# EAGLE board BeatLights (EAGLE 6.3)
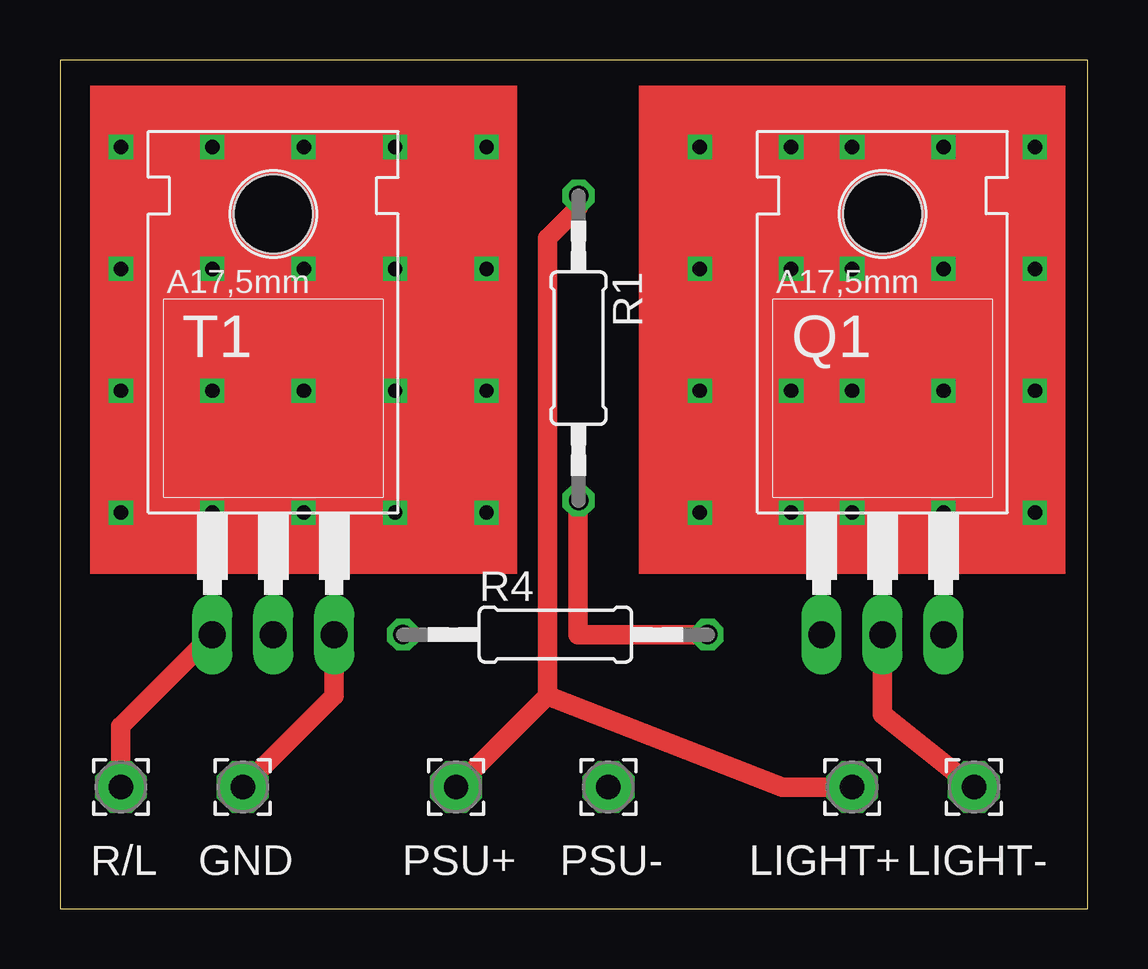
[diagram p0: board, top side]
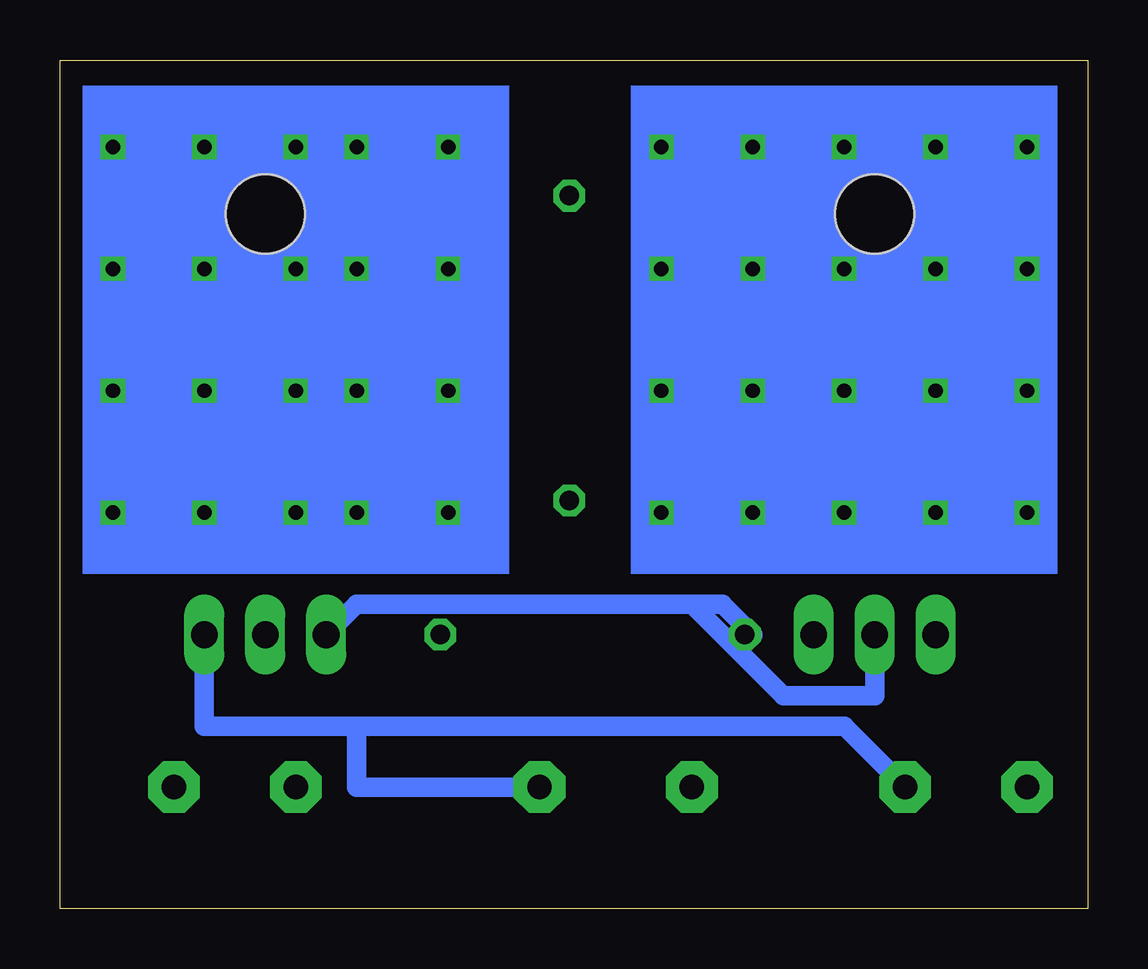
[diagram p1: board, bottom side, seen from below]

Size 42.85 x 35.37 mm. Coordinates in mm from the lower left corner, seen from the top.
Outline: 0,0 42.85,0 42.85,35.37 0,35.37 0,0
Copper layers (1*16): Top 0.035mm / dielectric 1.5mm / Bottom 0.035mm
Design rules "default": minimum track width 10mil, minimum drill 24mil, track to track 8mil, track to pad 8mil, pad to pad 8mil, via to via 8mil, smd to smd 8mil, copper to edge 40mil, drill to drill 8mil, minimum pad ring 10mil, minimum via ring 8mil, stop-mask expansion 4mil, vias tented up to drill 0mil, thermal gap 10mil

## Footprints (pad centres in the part's own frame; a part is rotated, then mirrored left to right if it is on the bottom)
2,15/1,0 = drill 1.016 pad 2.159 octagon: 1 0,0
TO220 = drill 1.118 long: 1 -2.54,-6.35; 2 0,-6.35; 3 2.54,-6.35 | hole 3.302: 0,11.176
0207/12 = drill 0.813 octagon: 1 -6.35,0; 2 6.35,0

## Placement (x,y rotation side)
GND  [2,15/1,0]  7.62,5.08 0 top
LIGHT+  [2,15/1,0]  33.02,5.08 0 top
LIGHT-  [2,15/1,0]  38.1,5.08 0 top
PSU+  [2,15/1,0]  16.51,5.08 0 top
PSU-  [2,15/1,0]  22.86,5.08 0 top
Q1  IRF510  [TO220]  34.29,17.78 0 top
R1  [0207/12]  21.62,23.37 270 top
R4  [0207/12]  20.65,11.43 0 top
R/L  [2,15/1,0]  2.54,5.08 0 top
T1  TIP31  [TO220]  8.89,17.78 0 top

## Library data of the parts
GND LIGHT+ LIGHT- PSU+ PSU- R/L = wirepad
Q1 = transistor-fet
R1 R4 = rcl
T1 = transistor

## Nets
N$1: R/L.1 T1.1
N$2: LIGHT-.1 Q1.2
N$3: R1.2 R4.2
N$4: GND.1 PSU-.1 Q1.3 T1.3
N$5: LIGHT+.1 PSU+.1 R1.1
N$6: Q1.1 R4.1 T1.2

## Tracks (layer width: path | path; a pad name or v marks a point on that pad's centre or on a via)
N$1
  Top 0.813: T1.1 2.54,7.62 R/L.1
N$2
  Top 0.813: Q1.2 34.29,8.1 LIGHT-.1
N$3
  Top 0.254: 21.59,16.51 R1.2
  Top 0.813: R4.2 21.59,11.43 21.59,16.51
N$4
  Top 0.813: T1.3 11.43,8.89 GND.1
  Bottom 0.813: 30.48,7.62 30.48,5.08 PSU-.1 | 30.48,7.62 36.83,7.62 Q1.3 | GND.1 10.16,7.62 30.48,7.62
N$5
  Top 0.254: 21.59,29.21 R1.1
  Top 0.813: 21.59,29.21 20.32,27.94 20.32,8.89 | PSU+.1 20.32,8.89 | LIGHT+.1 30.12,5.08 20.32,8.89
N$6
  Bottom 0.254: 13.97,11.43 R4.1
  Bottom 0.813: 13.97,11.43 15.24,12.7 16.51,12.7 | 16.51,12.7 30.48,12.7 Q1.1 | T1.2 8.89,8.89 12.7,8.89 16.51,12.7
N$7  (via drill 0.6)
  other vias: 2.54,31.75
N$8  (via drill 0.6)
  other vias: 6.35,31.75
N$9  (via drill 0.6)
  other vias: 10.16,31.75
N$10  (via drill 0.6)
  other vias: 13.97,31.75
N$11  (via drill 0.6)
  other vias: 17.78,31.75
N$12  (via drill 0.6)
  other vias: 17.78,26.67
N$13  (via drill 0.6)
  other vias: 13.97,26.67
N$14  (via drill 0.6)
  other vias: 10.16,26.67
N$15  (via drill 0.6)
  other vias: 6.35,26.67
N$16  (via drill 0.6)
  other vias: 2.54,26.67
N$17  (via drill 0.6)
  other vias: 2.54,21.59
N$18  (via drill 0.6)
  other vias: 6.35,21.59
N$19  (via drill 0.6)
  other vias: 10.16,21.59
N$20  (via drill 0.6)
  other vias: 13.97,21.59
N$21  (via drill 0.6)
  other vias: 17.78,21.59
N$22  (via drill 0.6)
  other vias: 17.78,16.51
N$23  (via drill 0.6)
  other vias: 13.97,16.51
N$24  (via drill 0.6)
  other vias: 10.16,16.51
N$25  (via drill 0.6)
  other vias: 6.35,16.51
N$26  (via drill 0.6)
  other vias: 2.54,16.51
N$27  (via drill 0.6)
  other vias: 40.64,31.75
N$28  (via drill 0.6)
  other vias: 36.83,31.75
N$29  (via drill 0.6)
  other vias: 33.02,31.75
N$30  (via drill 0.6)
  other vias: 30.48,31.75
N$31  (via drill 0.6)
  other vias: 26.67,31.75
N$32  (via drill 0.6)
  other vias: 26.67,26.67
N$33  (via drill 0.6)
  other vias: 30.48,26.67
N$34  (via drill 0.6)
  other vias: 33.02,26.67
N$35  (via drill 0.6)
  other vias: 36.83,26.67
N$36  (via drill 0.6)
  other vias: 40.64,26.67
N$37  (via drill 0.6)
  other vias: 40.64,21.59
N$38  (via drill 0.6)
  other vias: 36.83,21.59
N$39  (via drill 0.6)
  other vias: 33.02,21.59
N$40  (via drill 0.6)
  other vias: 30.48,21.59
N$41  (via drill 0.6)
  other vias: 26.67,21.59
N$42  (via drill 0.6)
  other vias: 26.67,16.51
N$43  (via drill 0.6)
  other vias: 30.48,16.51
N$44  (via drill 0.6)
  other vias: 33.02,16.51
N$45  (via drill 0.6)
  other vias: 36.83,16.51
N$46  (via drill 0.6)
  other vias: 40.64,16.51
(copper drawn outside any net)
  shapes: Bottom area x3, Top area x2